# Altium PCB Top.PcbDoc (part 2 of 3)
Units mm, origin at the board's own origin, x right, y up, seen from the top; angles counter-clockwise.
Board outline 65.25 x 71.45 mm, 4 copper layers (Top Layer, GND, PWR_3V3, Bottom Layer), stack 0.603 mm thick; 141 components, 87 nets, 448 pads, 153 vias.
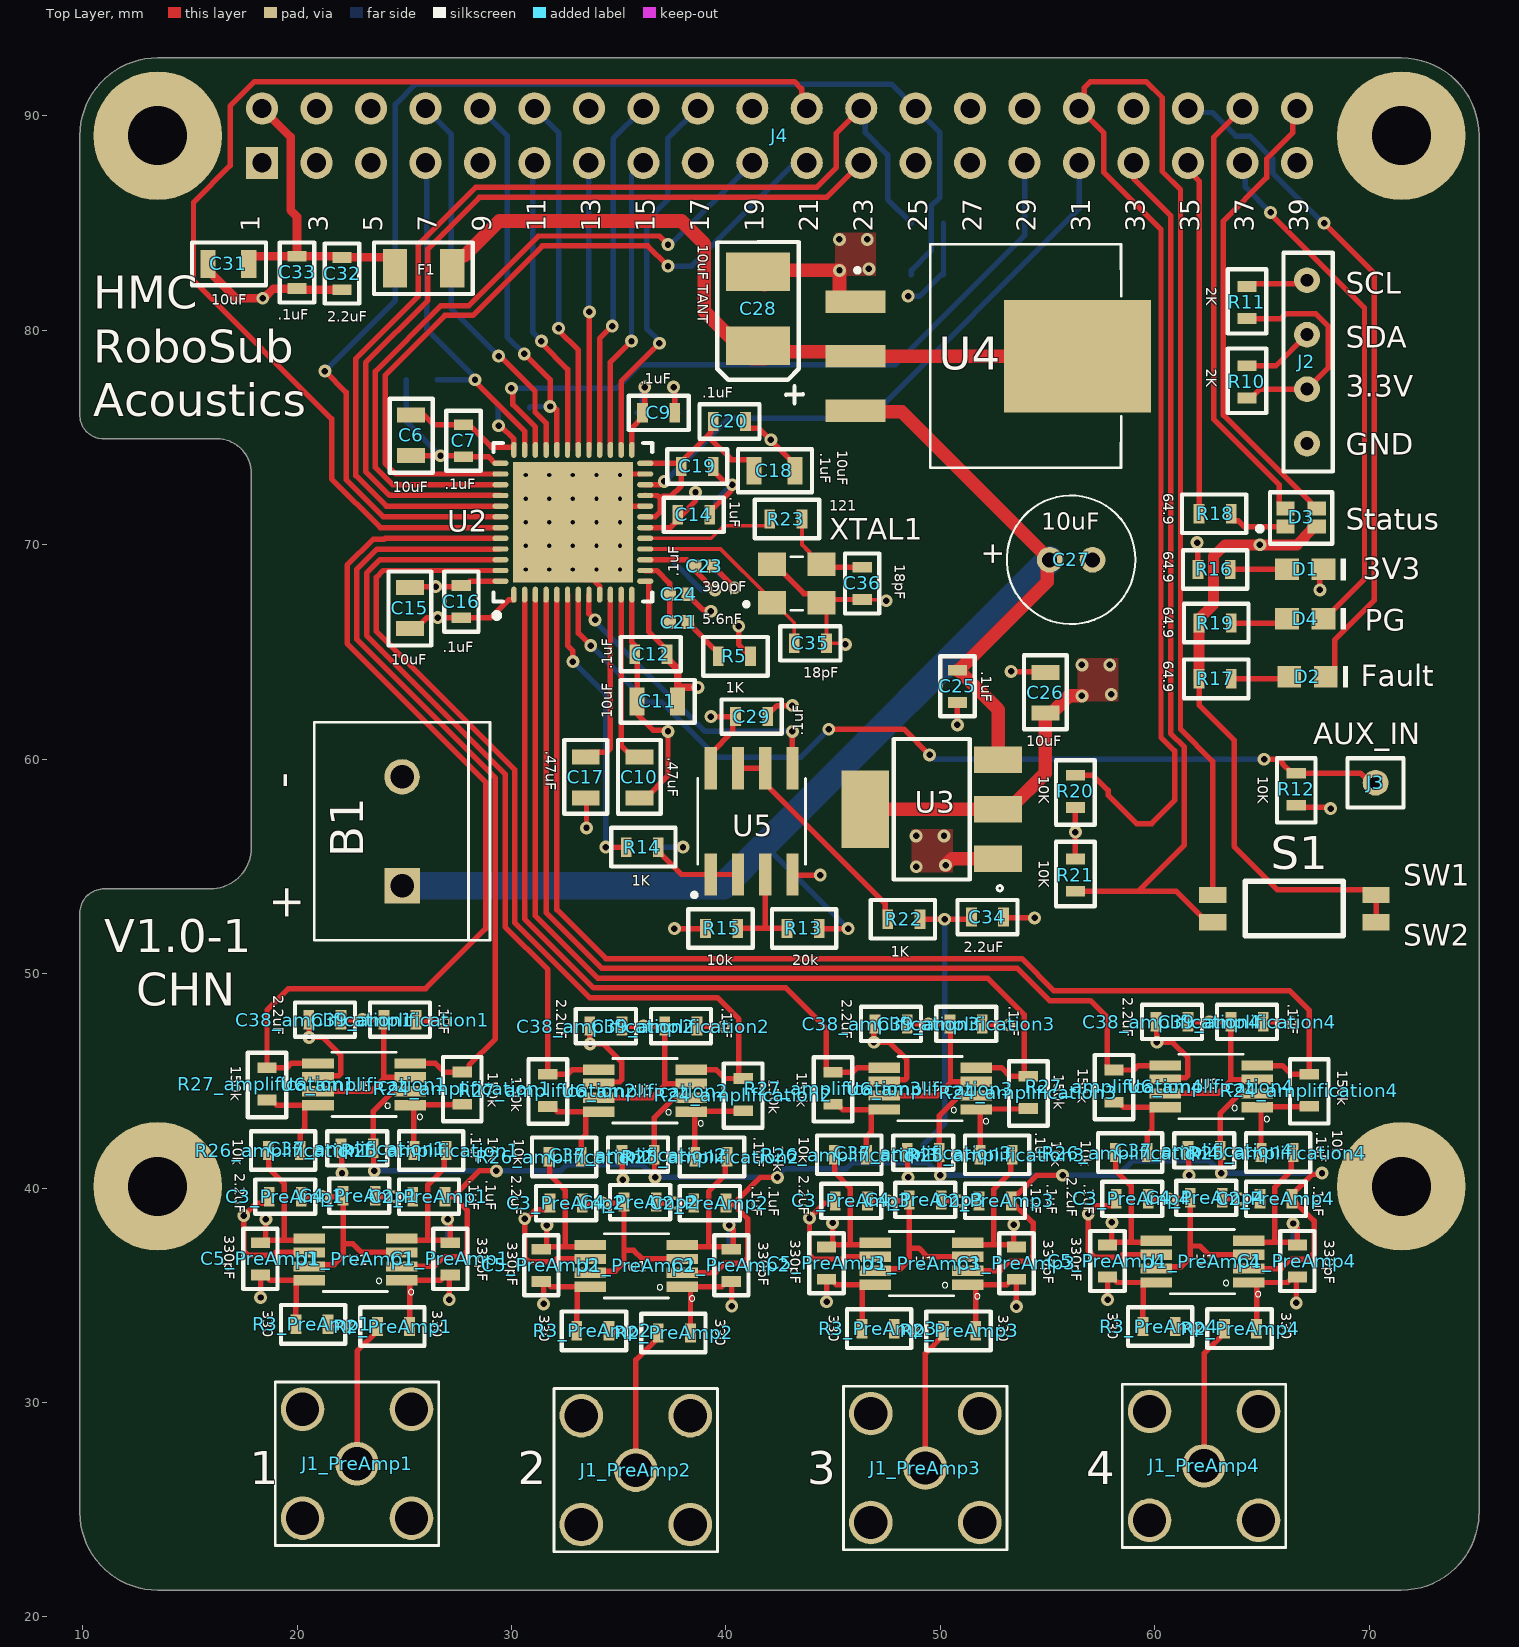
[diagram p0: Top Layer view]

## Part data (continued)
R5 R14 R22: library part TNPW06031K00BEEA, "RES 1K OHM 0.1% 1/8W 0603", Case/Package=0603, Case Code (Metric)=1608, Manufacturer 1="Vishay Dale", Max Operating Temperature=125°C, Max Power Dissipation=100mW, Min Operating Temperature=-55°C, Package Quantity=1, Resistance=1kR, Supplier Part Number 1=TNP1.00KAACT-ND, Temperature Coefficient=25ppm/°C, Tolerance=1%, Voltage Rating=75V, Case Code (Imperial)=0603, ComponentLink1Description=https://datasheet.ciiva.com/2528/tnpw-e3-2528472.pdf?src-supplier=Digi-Key, ComponentLink1URL=https://datasheet.ciiva.com/2528/tnpw-e3-2528472.pdf?src-supplier=Digi-Key, ComponentLink2Description=https://datasheet.ciiva.com/2528/tnpw-e3-2528473.pdf?src-supplier=Digi-Key, ComponentLink2URL=https://datasheet.ciiva.com/2528/tnpw-e3-2528473.pdf?src-supplier=Digi-Key, ComponentLink3Description=https://datasheet.ciiva.com/9112/tnpw-e3-9112138.pdf?src-supplier=Avnet, ComponentLink3URL=https://datasheet.ciiva.com/9112/tnpw-e3-9112138.pdf?src-supplier=Avnet, ComponentLink4Description=https://datasheet.ciiva.com/16391/tnpw-e3-16391675.pdf?src-supplier=Future+Electronics, ComponentLink4URL=https://datasheet.ciiva.com/16391/tnpw-e3-16391675.pdf?src-supplier=Future+Electronics, ComponentLink5Description=https://datasheet.ciiva.com/9112/tnpw-e3-9112141.pdf?src-supplier=Avnet, ComponentLink5URL=https://datasheet.ciiva.com/9112/tnpw-e3-9112141.pdf?src-supplier=Avnet, ComponentLink6Description=https://datasheet.ciiva.com/16782/70201627-16782047.pdf?src-supplier=Allied+Electronics, ComponentLink6URL=https://datasheet.ciiva.com/16782/70201627-16782047.pdf?src-supplier=Allied+Electronics, Composition="Thin Film", Contact Plating=Tin, Depth=0.85mm, Features="Moisture Resistant,Automotive AEC-Q200,Anti-Sulfur", Height=0.45mm, Lead Free="Lead Free", Length=1.6mm, Manufacturer Part Number 1=TNPW06031K00BEEA, Military Standard=Not, Mount="Surface Mount", Number of Terminations=2, Packaging="Tape and Reel", Power Rating=100mW, Pricing 1="1=0.65000, 10=0.46200, 100=0.24020, 1000=0.12936, 2500=0.12760 (USD)", Radiation Hardening=No, REACH SVHC=Unknown, RoHS=Yes, Stock 1=92047, Supplier 1=Digi-Key, Termination=SMD/SMT, Voltage Rating (DC)=75V, Weight=7.1E-05oz, Width=0.033inch
R6 R7 R8 R9 R12 R20 R21: library part TNPW060310K0BEEA, "RES 10K OHM 0.1% 1/8W 0603", Case/Package=0603, Case Code (Metric)=1608, Manufacturer 1="Vishay Dale", Max Operating Temperature=125°C, Max Power Dissipation=100mW, Min Operating Temperature=-55°C, Package Quantity=1, Resistance=10kR, Supplier Part Number 1=TNP10.0KAACT-ND, Temperature Coefficient=25ppm/°C, Tolerance=1%, Voltage Rating=75V, Case Code (Imperial)=0603, ComponentLink1Description=https://datasheet.ciiva.com/2483/tnpw-e3-2483253.pdf?src-supplier=Digi-Key, ComponentLink1URL=https://datasheet.ciiva.com/2483/tnpw-e3-2483253.pdf?src-supplier=Digi-Key, ComponentLink2Description=https://datasheet.ciiva.com/17190/tnpw-e3-17190917.pdf?src-supplier=Avnet+Europe, ComponentLink2URL=https://datasheet.ciiva.com/17190/tnpw-e3-17190917.pdf?src-supplier=Avnet+Europe, ComponentLink3Description=https://datasheet.ciiva.com/2483/tnpw-e3-2483254.pdf?src-supplier=Digi-Key, ComponentLink3URL=https://datasheet.ciiva.com/2483/tnpw-e3-2483254.pdf?src-supplier=Digi-Key, ComponentLink4Description=https://datasheet.ciiva.com/2483/tnpw-e3-2483255.pdf?src-supplier=Digi-Key, ComponentLink4URL=https://datasheet.ciiva.com/2483/tnpw-e3-2483255.pdf?src-supplier=Digi-Key, ComponentLink5Description=https://datasheet.ciiva.com/16335/tnpw-e3-16335132.pdf?src-supplier=Future+Electronics, ComponentLink5URL=https://datasheet.ciiva.com/16335/tnpw-e3-16335132.pdf?src-supplier=Future+Electronics, ComponentLink6Description=https://datasheet.ciiva.com/28589/1912606-28589004.pdf?src-supplier=Element14, ComponentLink6URL=https://datasheet.ciiva.com/28589/1912606-28589004.pdf?src-supplier=Element14, ComponentLink7Description=https://datasheet.ciiva.com/7792/tnpw-e3-7792477.pdf?src-supplier=Element14, ComponentLink7URL=https://datasheet.ciiva.com/7792/tnpw-e3-7792477.pdf?src-supplier=Element14, ComponentLink8Description=https://datasheet.ciiva.com/9050/tnpw-e3-9050974.pdf?src-supplier=Avnet, ComponentLink8URL=https://datasheet.ciiva.com/9050/tnpw-e3-9050974.pdf?src-supplier=Avnet, Composition="Thin Film", Contact Plating=Tin, Depth=0.85mm, Features="Moisture Resistant,Automotive AEC-Q200,Anti-Sulfur", Height=0.022inch, Length=1.6mm, Manufacturer Part Number 1=TNPW060310K0BEEA, Military Standard=Not, Mount="Surface Mount", Number of Terminations=2, Packaging="Tape and Reel", Power Rating=100mW, Pricing 1="1=0.65000, 10=0.46200, 100=0.24020, 1000=0.12936, 2500=0.12760 (USD)", Radiation Hardening=No, REACH SVHC=Unknown, RoHS=Yes, Stock 1=296181, Supplier 1=Digi-Key, Termination=SMD/SMT, Weight=7.1E-05oz, Width=0.033inch
R10 R11: library part TNPW06032K00BEEA, "RES 2K OHM 0.1% 1/8W 0603", Case/Package=0603, Case Code (Metric)=1608, Manufacturer 1="Vishay Dale", Max Operating Temperature=125°C, Max Power Dissipation=100mW, Min Operating Temperature=-55°C, Package Quantity=1, Resistance=2kR, Supplier Part Number 1=TNP2.00KAACT-ND, Temperature Coefficient=25ppm/°C, Tolerance=1%, Voltage Rating=75V, Voltage Rating (DC)=50V, Case Code (Imperial)=0603, ComponentLink1Description=https://datasheet.ciiva.com/17202/tnpw-e3-17202951.pdf?src-supplier=Avnet+Europe, ComponentLink1URL=https://datasheet.ciiva.com/17202/tnpw-e3-17202951.pdf?src-supplier=Avnet+Europe, ComponentLink2Description=https://datasheet.ciiva.com/28621/1599293-28621623.pdf?src-supplier=Element14, ComponentLink2URL=https://datasheet.ciiva.com/28621/1599293-28621623.pdf?src-supplier=Element14, ComponentLink3Description=https://datasheet.ciiva.com/9094/tnpw-e3-9094713.pdf?src-supplier=Avnet, ComponentLink3URL=https://datasheet.ciiva.com/9094/tnpw-e3-9094713.pdf?src-supplier=Avnet, ComponentLink4Description=https://datasheet.ciiva.com/2483/tnpw-e3-2483322.pdf?src-supplier=Digi-Key, ComponentLink4URL=https://datasheet.ciiva.com/2483/tnpw-e3-2483322.pdf?src-supplier=Digi-Key, ComponentLink5Description=https://datasheet.ciiva.com/2483/tnpw-e3-2483323.pdf?src-supplier=Digi-Key, ComponentLink5URL=https://datasheet.ciiva.com/2483/tnpw-e3-2483323.pdf?src-supplier=Digi-Key, ComponentLink6Description=https://datasheet.ciiva.com/2483/tnpw-e3-2483324.pdf?src-supplier=Digi-Key, ComponentLink6URL=https://datasheet.ciiva.com/2483/tnpw-e3-2483324.pdf?src-supplier=Digi-Key, Composition="Thin Film", Contact Plating=Tin, Depth=0.85mm, Features="Moisture Resistant,Automotive AEC-Q200,Anti-Sulfur", Height=0.45mm, Lead Free="Lead Free", Length=1.6mm, Manufacturer Part Number 1=TNPW06032K00BEEA, Military Standard=Not, Number of Terminations=2, Packaging="Tape and Reel", Power Rating=100mW, Pricing 1="1=0.65000, 10=0.46200, 100=0.24020, 1000=0.12936, 2500=0.12760 (USD)", Radiation Hardening=No, REACH SVHC=Unknown, RoHS=Yes, Stock 1=36426, Supplier 1=Digi-Key, Termination=SMD/SMT, Weight=7.1E-05oz, Width=0.033inch
R13: library part MCT06030E2002BP500, "Res Thin Film 0603 20K Ohm 0.1% 0.1W(1/10W) ±15ppm/C Molded SMD Automotive Medical Paper T/R", Case/Package=0603, Manufacturer 1="Vishay Semiconductors", Max Operating Temperature=125°C, Min Operating Temperature=-55°C, Resistance=20kR, Supplier Part Number 1=749-1747-1-ND, Temperature Coefficient=15ppm/°C, Tolerance=0.1%, ComponentLink1Description=https://datasheet.ciiva.com/17185/mc-pre-17185448.pdf?src-supplier=Avnet+Europe, ComponentLink1URL=https://datasheet.ciiva.com/17185/mc-pre-17185448.pdf?src-supplier=Avnet+Europe, ComponentLink2Description=https://datasheet.ciiva.com/8897/mc-pre-8897916.pdf?src-supplier=Avnet, ComponentLink2URL=https://datasheet.ciiva.com/8897/mc-pre-8897916.pdf?src-supplier=Avnet, Composition="Thin Film", Contact Plating=Tin, Depth=0.85mm, Lead Free="Lead Free", Length=1.55mm, Manufacturer Part Number 1=MCT06030E2002BP500, Military Standard=Not, Packaging="Tape and Reel", Pricing 1="1=0.70000, 10=0.58600, 100=0.39360, 1000=0.23128 (USD)", Radiation Hardening=No, RoHS=Yes, Stock 1=75960, Supplier 1=Digi-Key
R15: library part ERA-3AEB103V, "PANASONIC - ERA-3AEB103V - RES, METAL FILM, 10K, 0.1%, 0.1W, 0603,", Case/Package=0603, Case Code (Metric)=1608, Manufacturer 1=Panasonic, Max Operating Temperature=155°C, Max Power Dissipation=100mW, Min Operating Temperature=-55°C, Package Quantity=5000, Resistance=10kR, Supplier Part Number 1=P10KDBCT-ND, Temperature Coefficient=25ppm/°C, Tolerance=0.1%, Voltage Rating=75V, Case Code (Imperial)=0603, ComponentLink1Description=https://datasheet.ciiva.com/5734/485442-5734528.pdf?src-supplier=Farnell, ComponentLink1URL=https://datasheet.ciiva.com/5734/485442-5734528.pdf?src-supplier=Farnell, ComponentLink2Description=https://datasheet.ciiva.com/11808/0900766b80fe20f7-11808028.pdf?src-supplier=RSComponents, ComponentLink2URL=https://datasheet.ciiva.com/11808/0900766b80fe20f7-11808028.pdf?src-supplier=RSComponents, ComponentLink3Description=https://datasheet.ciiva.com/29183/451250-da-01-en-widerstand-0603-era-29183809.pdf?src-supplier=Conrad, ComponentLink3URL=https://datasheet.ciiva.com/29183/451250-da-01-en-widerstand-0603-era-29183809.pdf?src-supplier=Conrad, ComponentLink4Description=https://datasheet.ciiva.com/9194/aoa0000ce26-9194213.pdf?src-supplier=Avnet, ComponentLink4URL=https://datasheet.ciiva.com/9194/aoa0000ce26-9194213.pdf?src-supplier=Avnet, ComponentLink5Description=https://datasheet.ciiva.com/46376/485442-46376357.pdf?src-supplier=Element14, ComponentLink5URL=https://datasheet.ciiva.com/46376/485442-46376357.pdf?src-supplier=Element14, ComponentLink6Description=https://datasheet.ciiva.com/17212/aoa0000ce26-17212070.pdf?src-supplier=Avnet+Europe, ComponentLink6URL=https://datasheet.ciiva.com/17212/aoa0000ce26-17212070.pdf?src-supplier=Avnet+Europe, ComponentLink7Description=https://datasheet.ciiva.com/46422/1776116-46422520.pdf?src-supplier=Element14, ComponentLink7URL=https://datasheet.ciiva.com/46422/1776116-46422520.pdf?src-supplier=Element14, ComponentLink8Description=https://datasheet.ciiva.com/16427/aoa0000ce26-16427097.pdf?src-supplier=Future+Electronics, ComponentLink8URL=https://datasheet.ciiva.com/16427/aoa0000ce26-16427097.pdf?src-supplier=Future+Electronics, ComponentLink9Description=https://datasheet.ciiva.com/24072/aoa0000ce26-197354-24072585.pdf?src-supplier=Mouser, ComponentLink9URL=https://datasheet.ciiva.com/24072/aoa0000ce26-197354-24072585.pdf?src-supplier=Mouser, ComponentLink10Description=https://datasheet.ciiva.com/46388/1776116-46388109.pdf?src-supplier=Element14, ComponentLink10URL=https://datasheet.ciiva.com/46388/1776116-46388109.pdf?src-supplier=Element14, ComponentLink11Description=https://datasheet.ciiva.com/30126/54aoa0000ce26-30126478.pdf?src-supplier=Onlinecomponents.com, ComponentLink11URL=https://datasheet.ciiva.com/30126/54aoa0000ce26-30126478.pdf?src-supplier=Onlinecomponents.com, ComponentLink12Description=https://datasheet.ciiva.com/46388/485442-46388110.pdf?src-supplier=Element14, ComponentLink12URL=https://datasheet.ciiva.com/46388/485442-46388110.pdf?src-supplier=Element14, ComponentLink13Description=https://datasheet.ciiva.com/5734/aoa0000ce26-5734527.pdf?src-supplier=Farnell, ComponentLink13URL=https://datasheet.ciiva.com/5734/aoa0000ce26-5734527.pdf?src-supplier=Farnell, Composition="Thin Film,Metal Film", Contact Plating=Tin, Depth=0.8mm, Height=0.45mm, Lead Free="Lead Free", Length=1.6mm, Manufacturer Part Number 1=ERA-3AEB103V, Military Standard=Not, Mount="Surface Mount", Number of Pins=2, Number of Terminations=2, Packaging="Tape and Reel", Power Rating=100mW, Pricing 1="1=0.35000, 10=0.30000, 100=0.11720, 1000=0.04906, 2500=0.04498 (USD)", Radiation Hardening=No, REACH SVHC="No SVHC", RoHS=Yes, Stock 1=1877208, Supplier 1=Digi-Key, Termination=SMD/SMT, Voltage Rating (DC)=75V, Width=0.8mm
R16 R17 R18 R19: library part CRCW060364R9FKEA, "RES SMD 64.9 OHM 1% 1/10W 0603", Case/Package=0603, Case Code (Metric)=1608, Manufacturer 1=Vishay, Max Operating Temperature=155°C, Max Power Dissipation=100mW, Min Operating Temperature=-55°C, Package Quantity=10, Resistance=64.9R, Supplier Part Number 1=541-64.9HCT-ND, Temperature Coefficient=100ppm/°C, Tolerance=1%, Voltage Rating=75V, Case Code (Imperial)=0603, ComponentLink1Description=https://datasheet.ciiva.com/2525/dcrcwe3-2525456.pdf?src-supplier=Digi-Key, ComponentLink1URL=https://datasheet.ciiva.com/2525/dcrcwe3-2525456.pdf?src-supplier=Digi-Key, ComponentLink2Description=https://datasheet.ciiva.com/2525/dcrcwe3-2525457.pdf?src-supplier=Digi-Key, ComponentLink2URL=https://datasheet.ciiva.com/2525/dcrcwe3-2525457.pdf?src-supplier=Digi-Key, ComponentLink3Description=https://datasheet.ciiva.com/22705/1697337-22705559.pdf?src-supplier=Element14, ComponentLink3URL=https://datasheet.ciiva.com/22705/1697337-22705559.pdf?src-supplier=Element14, ComponentLink4Description=https://datasheet.ciiva.com/3257/dcrcwe3-3257816.pdf?src-supplier=Avnet, ComponentLink4URL=https://datasheet.ciiva.com/3257/dcrcwe3-3257816.pdf?src-supplier=Avnet, ComponentLink5Description=https://datasheet.ciiva.com/7823/1697337-7823000.pdf?src-supplier=Element14, ComponentLink5URL=https://datasheet.ciiva.com/7823/1697337-7823000.pdf?src-supplier=Element14, ComponentLink6Description=https://datasheet.ciiva.com/7823/1697337-7823001.pdf?src-supplier=Element14, ComponentLink6URL=https://datasheet.ciiva.com/7823/1697337-7823001.pdf?src-supplier=Element14, ComponentLink7Description=https://datasheet.ciiva.com/16204/dcrcwe3-16204218.pdf?src-supplier=Future+Electronics, ComponentLink7URL=https://datasheet.ciiva.com/16204/dcrcwe3-16204218.pdf?src-supplier=Future+Electronics, ComponentLink8Description=https://datasheet.ciiva.com/22674/1847332-22674604.pdf?src-supplier=Element14, ComponentLink8URL=https://datasheet.ciiva.com/22674/1847332-22674604.pdf?src-supplier=Element14, ComponentLink9Description=https://datasheet.ciiva.com/5541/dcrcwe3-109170-5541133.pdf?src-supplier=Mouser, ComponentLink9URL=https://datasheet.ciiva.com/5541/dcrcwe3-109170-5541133.pdf?src-supplier=Mouser, ComponentLink10Description=https://datasheet.ciiva.com/2525/dcrcwe3-2525455.pdf?src-supplier=Digi-Key, ComponentLink10URL=https://datasheet.ciiva.com/2525/dcrcwe3-2525455.pdf?src-supplier=Digi-Key, Composition="Thick Film", Contact Plating=Tin, Depth=0.85mm, Features="Automotive AEC-Q200", Height=0.02inch, Lead Free="Lead Free", Length=1.55mm, Manufacturer Part Number 1=CRCW060364R9FKEA, Military Standard=Not, Number of Pins=2, Number of Terminations=2, Packaging="Tape and Reel", Power Rating=100mW, Pricing 1="1=0.10000, 10=0.03600, 100=0.01460, 1000=0.00654, 2500=0.00568 (USD)", Radiation Hardening=No, REACH SVHC=Unknown, RoHS=Yes, Stock 1=18928, Supplier 1=Digi-Key, Termination=SMD/SMT, Voltage Rating (DC)=75V, Weight=7.1E-05oz, Width=0.033inch
R23: library part RP73PF1J121RBTDF, "TE CONNECTIVITY         RP73PF1J121RBTDF             SMD Chip Resistor, Thin Film, 121 ohm, 100 V, 0603 [1608 Metric], 166 mW,  0.1%, RN73 Series", Case/Package=0603, Case Code (Metric)=1608, Manufacturer 1="TE Connectivity", Max Operating Temperature=155°C, Max Power Dissipation=167mW, Min Operating Temperature=-55°C, Package Quantity=1000, Power Rating=166mW, Resistance=121R, Supplier Part Number 1=A110020CT-ND, Temperature Coefficient=25ppm/°C, Tolerance=0.1%, Voltage Rating=100V, Case Code (Imperial)=0603, ComponentLink1Description=https://datasheet.ciiva.com/7801/1635325-7801605.pdf?src-supplier=Element14, ComponentLink1URL=https://datasheet.ciiva.com/7801/1635325-7801605.pdf?src-supplier=Element14, ComponentLink2Description=https://datasheet.ciiva.com/18601/eng-ds-1773272-j-18601303.pdf?src-supplier=Digi-Key, ComponentLink2URL=https://datasheet.ciiva.com/18601/eng-ds-1773272-j-18601303.pdf?src-supplier=Digi-Key, ComponentLink3Description=https://datasheet.ciiva.com/18601/eng-ds-1773272-j-18601304.pdf?src-supplier=Digi-Key, ComponentLink3URL=https://datasheet.ciiva.com/18601/eng-ds-1773272-j-18601304.pdf?src-supplier=Digi-Key, ComponentLink4Description=https://datasheet.ciiva.com/18601/eng-ds-1773272-j-18601305.pdf?src-supplier=Digi-Key, ComponentLink4URL=https://datasheet.ciiva.com/18601/eng-ds-1773272-j-18601305.pdf?src-supplier=Digi-Key, Composition="Thin Film", Depth=0.8mm, Height=0.022inch, Length=0.061inch, Manufacturer Part Number 1=RP73PF1J121RBTDF, Mount="Surface Mount", Number of Terminations=2, Packaging="Tape and Reel", Pricing 1="1=0.66000, 10=0.48500, 100=0.28230 (USD)", REACH SVHC="No SVHC", RoHS=Yes, Stock 1=850, Supplier 1=Digi-Key, Termination=Solder, Voltage Rating (DC)=100V, Width=0.031inch
R24_amplification1 R24_amplification2 R24_amplification3 R24_amplification4 R27_amplification1 R27_amplification2 R27_amplification3 R27_amplification4: library part CRGCQ0603F150K, "CRGCQ 0603 150K 1%", Case/Package=0603, Case Code (Metric)=1608, Manufacturer 1=Yageo, Manufacturer Part Number 1=RC0603JR-0710KL, Max Operating Temperature=155°C, Min Operating Temperature=-55°C, Power Rating=100mW, Resistance=10kR, Supplier Part Number 1=311-10KGRCT-ND, Temperature Coefficient=100ppm/°C, Tolerance=5%, Voltage Rating=50V, Case Code (Imperial)=0603, ComponentLink1Description=https://datasheet.ciiva.com/2452/pyu-rc0603-51-rohs-l-4-2452848.pdf?src-supplier=Digi-Key, ComponentLink1URL=https://datasheet.ciiva.com/2452/pyu-rc0603-51-rohs-l-4-2452848.pdf?src-supplier=Digi-Key, ComponentLink2Description=https://datasheet.ciiva.com/7746/443971-7746427.pdf?src-supplier=Element14, ComponentLink2URL=https://datasheet.ciiva.com/7746/443971-7746427.pdf?src-supplier=Element14, ComponentLink3Description=https://datasheet.ciiva.com/22747/443971-22747531.pdf?src-supplier=Element14, ComponentLink3URL=https://datasheet.ciiva.com/22747/443971-22747531.pdf?src-supplier=Element14, ComponentLink4Description=https://datasheet.ciiva.com/7746/443971-7746428.pdf?src-supplier=Element14, ComponentLink4URL=https://datasheet.ciiva.com/7746/443971-7746428.pdf?src-supplier=Element14, ComponentLink5Description=https://datasheet.ciiva.com/15189/getdatasheetpartid-327958-15189847.pdf?src-supplier=Verical, ComponentLink5URL=https://datasheet.ciiva.com/15189/getdatasheetpartid-327958-15189847.pdf?src-supplier=Verical, ComponentLink6Description=https://datasheet.ciiva.com/8883/pyu-rc0603-51-rohs-l-4-8883049.pdf?src-supplier=Avnet, ComponentLink6URL=https://datasheet.ciiva.com/8883/pyu-rc0603-51-rohs-l-4-8883049.pdf?src-supplier=Avnet, Composition="Thick Film", Contact Plating=Tin,Matte, Depth=0.8mm, Lead Free="Lead Free", Length=1.6mm, Military Standard=Not, Number of Pins=2, Packaging="Tape and Reel", Pricing 1="1=0.10000, 10=0.01700, 100=0.00710, 1000=0.00318, 2500=0.00276 (USD)", Radiation Hardening=No, REACH SVHC=Unknown, RoHS=Yes, Stock 1=22910838, Supplier 1=Digi-Key, Termination=SMD/SMT, Voltage Rating (DC)=50V, Width=0.8mm
R25_amplification1 R25_amplification2 R25_amplification3 R25_amplification4 R26_amplification1 R26_amplification2 R26_amplification3 R26_amplification4: library part RC0603JR-0710KL, "RES SMD 10K OHM 5% 1/10W 0603"
S1: library part CHS-02TB, "SWITCH SLIDE DIP SPST 100MA 6V", Case/Package=DIP, Contact Resistance=50mR, Current Rating=25mA, Max Current Rating=100mA, Max Operating Temperature=85°C, Max Voltage Rating (DC)=24V, Min Operating Temperature=-40°C, Package Quantity=1, Supplier Part Number 1=563-1006-1-ND, Actuator Length=0mm, Actuator Material=Polyamide, Actuator Type="Slide (Standard)", Body Material=Polyphenylene, ComponentLink1Description=https://datasheet.ciiva.com/2863/sda-17mar15-2863531.pdf?src-supplier=Digi-Key, ComponentLink1URL=https://datasheet.ciiva.com/2863/sda-17mar15-2863531.pdf?src-supplier=Digi-Key, ComponentLink2Description=https://datasheet.ciiva.com/16356/sda02h0sbr-16356011.pdf?src-supplier=Future+Electronics, ComponentLink2URL=https://datasheet.ciiva.com/16356/sda02h0sbr-16356011.pdf?src-supplier=Future+Electronics, ComponentLink3Description=https://datasheet.ciiva.com/2863/sda-17mar15-2863532.pdf?src-supplier=Digi-Key, ComponentLink3URL=https://datasheet.ciiva.com/2863/sda-17mar15-2863532.pdf?src-supplier=Digi-Key, ComponentLink4Description=https://datasheet.ciiva.com/2863/sda-17mar15-2863533.pdf?src-supplier=Digi-Key, ComponentLink4URL=https://datasheet.ciiva.com/2863/sda-17mar15-2863533.pdf?src-supplier=Digi-Key, Contact Material=Copper,Gold, Contact Plating=Gold, Depth=9.3mm, Electrical Life=1000Cycles, Lead Free="Lead Free", Length=0.278inch, Mechanical Life=1000Cycles, Mount="Surface Mount", Number of Circuits=2, Number of Positions=2, Orientation=Straight, Packaging="Tape and Reel", Pitch=0.1inch, Radiation Hardening=No, REACH SVHC="No SVHC", RoHS=Yes, Supplier 1=Digi-Key, Terminal Pitch=2.54mm, Termination="Gull Wing", Throw Configuration=SPST, Voltage Rating (DC)=24V, Washable=Yes
U1_PreAmp1 U1_PreAmp2 U1_PreAmp3 U1_PreAmp4 U6_amplification1 U6_amplification2 U6_amplification3 U6_amplification4: "Low Noise, Precision, 150MHz, Fully Differential Amplifier 8-VSSOP -40 to 125", Case/Package=VSSOP, Input Bias Current=1uA, Input Offset Voltage (Vos)=50uV, Manufacturer 1="Texas Instruments", Manufacturer 2="TE Connectivity", Manufacturer Part Number 2=CRGCQ0603F150K, Max Operating Temperature=125°C, Min Operating Temperature=-40°C, Operating Supply Current=1.35mA, Output Current per Channel=65mA, Supplier Part Number 1=296-44771-1-ND, -3db Bandwidth=150MHz, Bandwidth=135MHz, ComponentLink1Description=http://www.ti.com/lit/ds/symlink/ths4551.pdf?src-supplier=Digi-Key, ComponentLink1URL=http://www.ti.com/lit/ds/symlink/ths4551.pdf?src-supplier=Digi-Key, ComponentLink2Description=http://www.ti.com/general/docs/lit/getliterature.tsp?genericPartNumber=THS4551&fileType=pdf&src-supplier=Farnell, ComponentLink2URL=http://www.ti.com/general/docs/lit/getliterature.tsp?genericPartNumber=THS4551&fileType=pdf&src-supplier=Farnell, ComponentLink3Description=http://www.farnell.com/datasheets/2148327.pdf?src-supplier=Element14, ComponentLink3URL=http://www.farnell.com/datasheets/2148327.pdf?src-supplier=Element14, ComponentLink4Description=https://octopart.com/click/track?ai=2118&ct=datasheets&sig=0013830&at=physicalpart&sid=370&ppid=71776714&hlid=24961842&src-supplier=TI+store, ComponentLink4URL=https://octopart.com/click/track?ai=2118&ct=datasheets&sig=0013830&at=physicalpart&sid=370&ppid=71776714&hlid=24961842&src-supplier=TI+store, ComponentLink5Description=http://sigma.octopart.com/49250154/technical_drawing/Texas-Instruments-THS4551IDGKT.pdf?src-supplier=TI+store, ComponentLink5URL=http://sigma.octopart.com/49250154/technical_drawing/Texas-Instruments-THS4551IDGKT.pdf?src-supplier=TI+store, ComponentLink6Description=http://datasheet.octopart.com/THS4551IDGKT-Texas-Instruments-datasheet-78835010.pdf?src-supplier=Element14, ComponentLink6URL=http://datasheet.octopart.com/THS4551IDGKT-Texas-Instruments-datasheet-78835010.pdf?src-supplier=Element14, ComponentLink7Description=http://datasheet.octopart.com/THS4551IDGKT-Texas-Instruments-datasheet-67294894.pdf?src-supplier=Newark, ComponentLink7URL=http://datasheet.octopart.com/THS4551IDGKT-Texas-Instruments-datasheet-67294894.pdf?src-supplier=Newark, ComponentLink8Description=https://www.te.com/commerce/DocumentDelivery/DDEController?Action=srchrtrv&DocNm=1773204-3&DocType=DS&DocLang=English&src-supplier=Digi-Key, ComponentLink8URL=https://www.te.com/commerce/DocumentDelivery/DDEController?Action=srchrtrv&DocNm=1773204-3&DocType=DS&DocLang=English&src-supplier=Digi-Key, ComponentLink9Description=https://www.te.com/commerce/DocumentDelivery/DDEController?Action=srchrtrv&amp;DocNm=1773204-3&amp;DocType=DS&amp;DocLang=English&src-supplier=Digi-Key, ComponentLink9URL=https://www.te.com/commerce/DocumentDelivery/DDEController?Action=srchrtrv&amp;DocNm=1773204-3&amp;DocType=DS&amp;DocLang=English&src-supplier=Digi-Key, Gain Bandwidth Product=135MHz, Lead Free="Lead Free", Manufacturer Part Number 1=THS4551IDGKT, Mount="Surface Mount", Number of Amplifiers=1, Number of Channels=1, Number of Circuits=1, Number of Pins=8, Packaging="Cut Tape", Pricing 1="1=3.84000, 10=3.44900, 100=2.82600 (USD)", Pricing 2="1=0.10000, 10=0.03100, 100=0.01260, 1000=0.00568, 2500=0.00493 (USD)", REACH SVHC="No SVHC", RoHS=No, Slew Rate=220V/µs, Stock 1=3028, Stock 2=37559, Supplier 1=Digi-Key, Supplier 2=Digi-Key, Supplier Part Number 2=A129714CT-ND
U2: library part CMP-0313-02423-1, "Continuous Time Data Acquisition ADC, 4-Channel, 16-Bit, -40 to 125 degC, 48-Pin QFN (CS-48-1), RoHS, Tray", Temperature Max="125 degC", Temperature Min="-40 degC", AVDD Max="3.6 V", AVDD Min="2.97 V", Channel=4, ComponentLink1Description="Manufacturer URL", ComponentLink1URL=http://www.analog.com/en/index.html, ComponentLink2Description=Datasheet, ComponentLink2URL=http://www.analog.com/media/en/technical-documentation/data-sheets/ADAR7251.pdf, ComponentLink3Description="Package Specification", ComponentLink3URL=http://www.analog.com/media/en/package-pcb-resources/package/pkg_pdf/lfcsp-cs-side-solderable/cs-48/CS_48_1.pdf, DatasheetVersion="Rev. 0", DVDD Max="1.98 V", DVDD Min="1.62 V", Mounting Technology="Surface Mount", Number of A/D Converters=4, PackageDescription="48-Pin Frame Chip Scale Package, Body 7 x 7 mm, Pitch 0.5 mm", PackageVersion=01/2014, Packing=Tray, PartNumber=ADAR7251WBCSZ, RoHS=TRUE, Sample Rate Max="1.8 MSPS"
U3: library part LD1117S33CTR, "STMICROELECTRONICS         LD1117S33CTR            Fixed LDO Voltage Regulator, 5.3V to 15V, 1.1V Dropout, 3.3Vout, 950mAout, SOT-223-4", Case/Package=SOT-223, Dropout Voltage=1.1V, Input Bias Current=5mA, Manufacturer 1=STMicroelectronics, Max Input Voltage=15V, Max Operating Temperature=125°C, Max Output Current=1.3A, Max Output Voltage=3.3V, Max Power Dissipation=12W, Min Input Voltage=5.3V, Min Operating Temperature=-40°C, Output Current=950mA, Output Voltage Accuracy=1%, Package Quantity=1, Quiescent Current=10mA, Supplier Part Number 1=497-1241-1-ND, Accuracy=1%, ComponentLink1Description=https://datasheet.ciiva.com/19480/1390223-19480586.pdf?src-supplier=Jameco, ComponentLink1URL=https://datasheet.ciiva.com/19480/1390223-19480586.pdf?src-supplier=Jameco, ComponentLink2Description=https://datasheet.ciiva.com/1511/1776449-1511572.pdf?src-supplier=Element14, ComponentLink2URL=https://datasheet.ciiva.com/1511/1776449-1511572.pdf?src-supplier=Element14, ComponentLink3Description=https://datasheet.ciiva.com/16392/cd00000544-16392069.pdf?src-supplier=Future+Electronics, ComponentLink3URL=https://datasheet.ciiva.com/16392/cd00000544-16392069.pdf?src-supplier=Future+Electronics, ComponentLink4Description=https://datasheet.ciiva.com/2041/cd00000544-2041932.pdf?src-supplier=Digi-Key, ComponentLink4URL=https://datasheet.ciiva.com/2041/cd00000544-2041932.pdf?src-supplier=Digi-Key, ComponentLink5Description=https://datasheet.ciiva.com/7992/1776449-7992620.pdf?src-supplier=Element14, ComponentLink5URL=https://datasheet.ciiva.com/7992/1776449-7992620.pdf?src-supplier=Element14, ComponentLink6Description=https://datasheet.ciiva.com/2041/cd00000544-2041933.pdf?src-supplier=Digi-Key, ComponentLink6URL=https://datasheet.ciiva.com/2041/cd00000544-2041933.pdf?src-supplier=Digi-Key, ComponentLink7Description=https://datasheet.ciiva.com/2041/cd00000544-2041934.pdf?src-supplier=Digi-Key, ComponentLink7URL=https://datasheet.ciiva.com/2041/cd00000544-2041934.pdf?src-supplier=Digi-Key, Contact Plating=Tin,Matte, Height=1.8mm, Lead Free="Lead Free", Length=6.5mm, Manufacturer Part Number 1=LD1117S33CTR, Max Supply Voltage=15V, Min Output Voltage=3.3V, Min Supply Voltage=3.3V, Mount="Surface Mount", Nominal Output Voltage=3.3V, Number of Outputs=1, Number of Pins=4, Number of Regulators=1, Number of Terminals=4, Output Type=Fixed, Output Voltage=3.3V, Packaging="Tape and Reel", Polarity=Positive, Power Dissipation=12W, Pricing 1="1=0.41000, 10=0.35100, 100=0.26180, 500=0.20570, 1000=0.15895 (USD)", Radiation Hardening=No, REACH SVHC="No SVHC", RoHS=Yes, Stock 1=43539, Supplier 1=Digi-Key, Termination=SMD/SMT, Weight=0.01lb, Width=3.5mm
U4: library part LM1085ISX-5.0/NOPB, "LDO Regulator Pos 5V 3A 4-Pin(3+Tab) TO-263 T/R", Case/Package=TO-263, Dropout Voltage=1.3V, Manufacturer 1="TI National Semiconductor", Max Input Voltage=25V, Max Operating Temperature=125°C, Max Output Current=3A, Min Current Limit=3.2A, Min Input Voltage=2.6V, Min Operating Temperature=-40°C, Nominal Output Voltage=5V, Package Quantity=500, Quiescent Current=10mA, Supplier Part Number 1=296-35391-1-ND, ComponentLink1Description=https://datasheet.ciiva.com/41457/001013600-da-01-en-ic-reg-l-lm1085isx-5-0-nopb-to-263-3-tid-41457355.pdf?src-supplier=Conrad, ComponentLink1URL=https://datasheet.ciiva.com/41457/001013600-da-01-en-ic-reg-l-lm1085isx-5-0-nopb-to-263-3-tid-41457355.pdf?src-supplier=Conrad, ComponentLink2Description=https://datasheet.ciiva.com/6582/lm1085-6582713.pdf?src-supplier=Digi-Key, ComponentLink2URL=https://datasheet.ciiva.com/6582/lm1085-6582713.pdf?src-supplier=Digi-Key, ComponentLink3Description=https://datasheet.ciiva.com/3223/lm1085-3223481.pdf?src-supplier=Avnet, ComponentLink3URL=https://datasheet.ciiva.com/3223/lm1085-3223481.pdf?src-supplier=Avnet, Contact Plating=Tin, Lead Free="Contains Lead", Manufacturer Part Number 1=LM1085ISX-5.0/NOPB, Mount="Surface Mount", Number of Outputs=1, Number of Pins=3, Number of Regulators=1, Output Current=3A, Output Type=Fixed, Output Voltage=5V, Packaging="Tape and Reel", Polarity=Positive, Pricing 1="1=1.97000, 10=1.77300, 100=1.42500 (USD)", Radiation Hardening=No, REACH SVHC="No SVHC", RoHS=Yes, Stock 1=2741, Supplier 1=Digi-Key
XTAL1: "Crystal 19.2MHz ±25ppm (Tol) ±30ppm (Stability) 12pF FUND 80Ohm 4-Pin Mini-CSMD T/R", Manufacturer 1="ECS International", Supplier Part Number 1=XC2452CT-ND, Manufacturer Part Number 1=ECS-192-12-33-AGM-TR, Pricing 1="1=0.56000, 10=0.46500, 50=0.41820, 100=0.37180, 500=0.35322 (USD)", Stock 1=1382, Supplier 1=Digi-Key

## Free pads (board coordinates)
  round 6 hole 2.75: ""(13.502,40.08) ""(13.502,89.08) ""(71.502,40.08) ""(71.502,89.08)

## Via types
v1: diameter 0.6, hole 0.3, Top Layer to Bottom Layer, tented both sides, 128 vias
v2: diameter 0.5, hole 0.2, Top Layer to Bottom Layer, 25 vias

## Nets (pads, with @x,y where several pads share a name; then routed paths per layer and width w, separated by ;. In a path a pad name is that pad's centre, name@x,y a point inside that pad or via, vN(x,y) a via of type N, cw(c..) or ccw(c..) an arc to the next point about the centre after c; other vN are vias at no path point)
3V3: C3_PreAmp1.1 C3_PreAmp2.1 C3_PreAmp3.1 C3_PreAmp4.1 C4_PreAmp1.1 C4_PreAmp2.1 C4_PreAmp3.1 C4_PreAmp4.1 C6.1 C7.2 C8.1 C9.2 C10.2 C11.2 C12.1 C13.2 C14.1 C15.2 C16.1 C22.2 C23.2 C26.2 C29.1 C38_amplification1.1 C38_amplification2.1 C38_amplification3.1 C38_amplification4.1 C39_amplification1.1 C39_amplification2.1 C39_amplification3.1 C39_amplification4.1 R7.2 R8.2 R9.2 R16.2 U1_PreAmp1.3 U1_PreAmp1.7 U1_PreAmp2.3 U1_PreAmp2.7 U1_PreAmp3.3 U1_PreAmp3.7 U1_PreAmp4.3 U1_PreAmp4.7 U2.12 U2.15 U2.18 U2.25 U2.37 U2.48 U3.2 U3.4 U5.8 U6_amplification1.3 U6_amplification1.7 U6_amplification2.3 U6_amplification2.7 U6_amplification3.3 U6_amplification3.7 U6_amplification4.3 U6_amplification4.7 | length 139.3
  Top Layer w0.254: C3_PreAmp1.1@20.2,39.603 v1(21.153,39.603) 22.105,39.603 C4_PreAmp1.1@22.15,39.648 22.15,37.4 ; U1_PreAmp1.7@20.574,36.349 20.657,36.432 21.732,36.432 22.15,36.85 22.15,37.4 ; U6_amplification1.7@20.979,44.515 23.461,44.515 24.054,45.108 ; C38_amplification1.1@22.177,47.735 C38_amplification1.1@22.054,47.858 v1(23.054,47.858) C39_amplification1.1@24.054,47.858 24.054,45.108 ; U1_PreAmp1.3@24.874,36.999 23.001,36.999 22.6,37.4 22.15,37.4 ; C15.2@25.266,68.002 25.316,68.052 v1(26.466,68.052) 27.616,68.052 C16.1@27.666,68.102 27.866,68.102 28.066,68.302 U2.48@29.491,68.302 ; U6_amplification1.3@25.279,45.165 24.111,45.165 24.054,45.108 ; C6.1@25.566,74.202 25.616,74.152 v1(26.693,74.152) 27.77,74.152 27.82,74.102 28.945,74.102 29.245,73.802 U2.37@29.491,73.802 ; C3_PreAmp2.1@33.3,39.303 v1(34.253,39.303) 35.205,39.303 C4_PreAmp2.1@35.25,39.348 35.25,37.1 ; U1_PreAmp2.7@33.674,36.049 33.757,36.132 34.832,36.132 35.25,36.55 35.25,37.1 ; U6_amplification2.7@34.079,44.215 36.561,44.215 37.154,44.808 ; C38_amplification2.1@35.277,47.435 C38_amplification2.1@35.154,47.558 v1(36.154,47.558) C39_amplification2.1@37.154,47.558 37.154,44.808 ; U2.12@35.616,67.677 35.616,65.448 35.864,65.2 C11.2@35.864,62.5 ; U2.25@35.616,74.427 35.616,75.452 36.116,75.952 C9.2@36.116,76.152 36.216,76.252 v1(36.216,77.352) ; C11.2@35.864,62.4 35.912,62.352 35.912,62.052 36.619,61.345 37.255,61.345 v1(37.3,61.3) ; C10.2@35.966,58.202 36.266,58.202 37.3,59.236 v1(37.3,61.3) ; U2.15@36.241,69.302 38.178,69.302 38.392,69.088 38.412,69.088 C23.2@38.58,68.92 ; U2.18@36.241,70.802 36.243,70.804 37.418,70.804 37.766,71.152 C14.1@37.766,71.352 ; v1@37.3,61.4 v1(37.3,61.3) ; C14.1@37.898,71.348 38.584,72.034 v1(38.584,72.448) ; U1_PreAmp2.3@37.974,36.699 36.101,36.699 35.7,37.1 35.25,37.1 ; U6_amplification2.3@38.379,44.865 37.211,44.865 37.154,44.808 ; C23.2@38.58,69 C23.2@38.58,68.92 ; U5.8@39.295,59.575 39.295,60.275 40.327,61.307 40.327,61.866 C29.1@40.45,61.989 v1(39.3,61.989) ; v1(39.5,67.9) 39.448,67.9 38.58,68.768 C23.2@38.58,68.92 ; C3_PreAmp3.1@46.6,39.403 v1(47.553,39.403) 48.505,39.403 C4_PreAmp3.1@48.55,39.448 48.55,37.2 ; U1_PreAmp3.7@46.974,36.149 47.057,36.232 48.132,36.232 48.55,36.65 48.55,37.2 ; U6_amplification3.7@47.379,44.315 49.861,44.315 50.454,44.908 ; C38_amplification3.1@48.577,47.535 C38_amplification3.1@48.454,47.658 v1(49.454,47.658) C39_amplification3.1@50.454,47.658 50.454,44.908 ; U1_PreAmp3.3@51.274,36.799 49.401,36.799 49,37.2 48.55,37.2 ; U6_amplification3.3@51.679,44.965 50.511,44.965 50.454,44.908 ; C3_PreAmp4.1@59.7,39.503 v1(60.653,39.503) 61.605,39.503 C4_PreAmp4.1@61.65,39.548 61.65,37.3 ; U1_PreAmp4.7@60.074,36.249 60.157,36.332 61.232,36.332 61.65,36.75 61.65,37.3 ; U6_amplification4.7@60.479,44.415 62.961,44.415 63.554,45.008 ; C38_amplification4.1@61.677,47.635 C38_amplification4.1@61.554,47.758 v1(62.554,47.758) C39_amplification4.1@63.554,47.758 63.554,45.008 ; v1(61.976,70.104) 61.997,70.083 61.997,68.871 R16.2@62.019,68.85 ; U1_PreAmp4.3@64.374,36.899 62.501,36.899 62.1,37.3 61.65,37.3 ; U6_amplification4.3@64.779,45.065 63.611,45.065 63.554,45.008
  Top Layer w0.635: U3.4@46.501,57.668 U3.2@52.699,57.668 53.207,57.668 54.9,59.361 C26.2@54.9,62.15 55.2,62.15 56.007,62.957 v1(56.605,62.957)
  Bottom Layer w0.254: R9.2@25.1,77.7 25.1,75.745 v1(26.693,74.152) ; C8.1@35.866,76.152 36.089,76.375 36.089,77.131 36.216,77.258 v1(36.216,77.352) ; C22.2@37.616,69.152 38.868,67.9 v1@39.3,67.9 ; C13.2@37.616,71.752 37.616,71.523 37.839,71.3 38.6,72.061 v1@38.6,72.4 ; v1(48.5,81.6) 49.05,81.6 R7.2@50.15,82.7 ; R7.2@50.15,82.6 R7.2@50.15,82.7 ; R8.2@50.15,85 R7.2@50.15,82.9 R7.2@50.15,82.7
  other v1: 57.973,63.027 56.6,64.4 57.9,64.4
3V3_2: D3.4 J2.2 J4.1 R10.2 R11.2 R17.2 R19.2 S1.1 S1.2 | length 100.4
  Top Layer w0.254: R17.2@62.069,63.75 62.069,62.518 63.7,60.887 63.7,55.934 65.711,53.923 69.812,53.923 70.065,53.67 S1.2@70.193,53.67 ; R10.2@64.3,76.85 64.5,76.85 64.91,77.26 J2.2@67.1,77.26 68.1,78.26 68.1,80.187 67.506,80.781 66.119,80.781 65.888,80.55 R11.2@64.3,80.55 ; S1.1@70.32,52.4 70.32,53.543 S1.2@70.193,53.67 ; S1.2@70.32,53.67 S1.2@70.193,53.67
  Top Layer w0.508: R17.2@62.069,63.75 R19.2@62.069,66.35 62.069,66.542 62.738,67.211 62.738,69.469 63.269,70 v1(64.9,70) 66.642,70 67.001,70.359 67.001,70.401 67.45,70.85 D3.4@67.55,70.85
  PWR_3V3 w0.254: 64.9,77.3 64.94,77.26
  PWR_3V3 w0.508: J4.1@18.372,87.81 20.838,85.344 58.166,85.344 64.9,78.61 64.9,77.3 v1(64.9,70) ; 64.94,77.26 J2.2@67.1,77.26
5V: C28.2 F1.2 U4.2 U4.4 | length 35.4
  Top Layer w0.635: F1.2@27.23,82.9 27.23,83.22 27.483,83.473 27.802,83.473 29.43,85.1 37.928,85.1 39,84.028 39,80.875 41.2,78.675 41.8,78.675 C28.2@41.862,78.737 ; C28.2@41.5,79.275 41.768,79.008 45.838,79.008 U4.2@46.045,78.8 U4.4@56.395,78.8
5V_fuse: C31.1 C32.1 C33.1 F1.1 J4.2 | length 15
  Top Layer w0.4: C31.1@17.75,83.1 17.75,83.3 17.9,83.45 C33.1@19.8,83.45 ; J4.2@18.372,90.35 19.7,89.022 19.7,85.6 20,85.3 C33.1@20,83.45 ; C33.1@19.75,83.5 C33.1@19.8,83.45 ; F1.1@24.57,82.9 24.57,83.03 24.2,83.4 C32.1@22.1,83.4 22.05,83.45 C33.1@20,83.45 ; C33.1@19.8,83.45 C33.1@20,83.45
9V: B1.1 C25.2 C27.2 R13.1 U3.3 U4.3 | length 67.2
  Top Layer w0.254: R13.1@44.35,52.111 44.361,52.1 v1(45.7,52.1)
  Top Layer w0.635: U4.3@46.045,76.26 46.105,76.2 48.2,76.2 C27.2@55.1,69.3 54.992,69.192 54.992,68.277 C25.2@50.865,64.15 ; C25.2@50.8,64.15 C25.2@50.865,64.15 ; U3.3@52.699,59.979 52.699,62.316 C25.2@50.865,64.15
  Bottom Layer w0.254: 41.8,56 v1(45.7,52.1)
  Bottom Layer w1.27: B1.1@24.9,54.1 39.9,54.1 41.8,56 C27.2@55.1,69.3
ADC_DATA0: J4.18 U2.26 | length 17.9
  Top Layer w0.254: U2.26@35.116,74.427 35.116,77.616 v1(36.9,79.4)
  Bottom Layer w0.254: v1(36.9,79.4) 36.9,79.494 36.3,80.094 36.3,85.1 37.283,86.083 37.283,88.941 J4.18@38.692,90.35
ADC_DATA1: J4.15 U2.27 | length 14
  Top Layer w0.254: U2.27@34.616,74.427 34.616,78.516 v1(35.6,79.5)
  Bottom Layer w0.254: v1(35.6,79.5) 35.6,87.258 J4.15@36.152,87.81
ADC_DATA2: J4.16 U2.28 | length 16.8
  Top Layer w0.254: U2.28@34.116,74.427 34.116,79.616 v1(34.7,80.2)
  Bottom Layer w0.254: v1(34.7,80.2) 34.743,80.243 34.743,88.941 J4.16@36.152,90.35
ADC_DATA3: J4.13 U2.29 | length 13.4
  Top Layer w0.254: U2.29@33.616,74.427 33.636,74.447 v1(33.636,80.865)
  Bottom Layer w0.254: J4.13@33.612,87.81 33.612,80.888 v1(33.636,80.865)
ADC_DATA4: J4.12 U2.30 | length 16.8
  Top Layer w0.254: v1(32.2,80.1) 32.2,80 33.116,79.084 U2.30@33.116,74.427
  Bottom Layer w0.254: J4.12@31.072,90.35 32.203,89.219 32.203,80.103 v1(32.2,80.1)
ADC_DATA5: J4.11 U2.31 | length 14.1
  Top Layer w0.254: v1(31.4,79.5) 31.4,79.4 32.616,78.184 U2.31@32.616,74.427
  Bottom Layer w0.254: J4.11@31.072,87.81 31,87.738 31,79.9 v1(31.4,79.5)
ADC_DATA6: J4.10 R6.2 U2.32 | length 18.2
  Top Layer w0.254: v1(30.6,78.9) 31.8,77.7 v1(31.8,76.45) ; v1@32.066,76.352 32.116,76.302 32.114,76.3 32.114,74.429 U2.32@32.116,74.427
  Bottom Layer w0.254: J4.10@28.532,90.35 29.8,89.082 29.8,79.7 v1(30.6,78.9) ; R6.2@30.85,76.4 30.9,76.45 v1(31.8,76.45)
ADC_DATA7: J4.8 U2.33 | length 18.3
  Top Layer w0.254: v1(29.4,78.8) 29.463,78.8 31.1,77.163 31.1,76.187 31.616,75.671 U2.33@31.616,74.427
  Bottom Layer w0.254: J4.8@25.992,90.35 27.2,89.142 27.2,81 v1(29.4,78.8)